# EAGLE board sim900min (EAGLE 6.2)
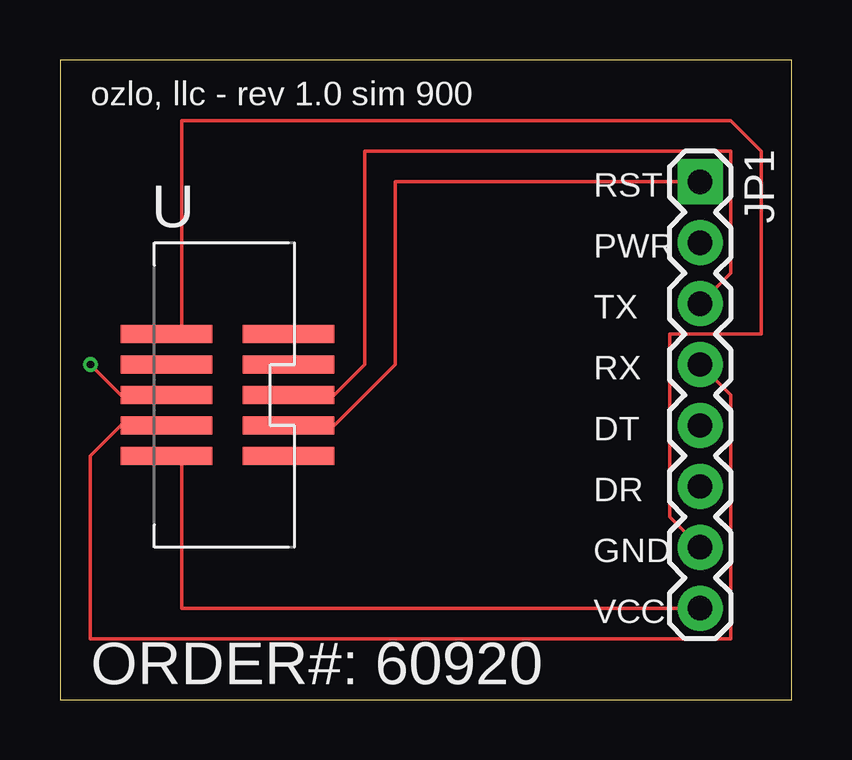
[diagram p0: board, top side]
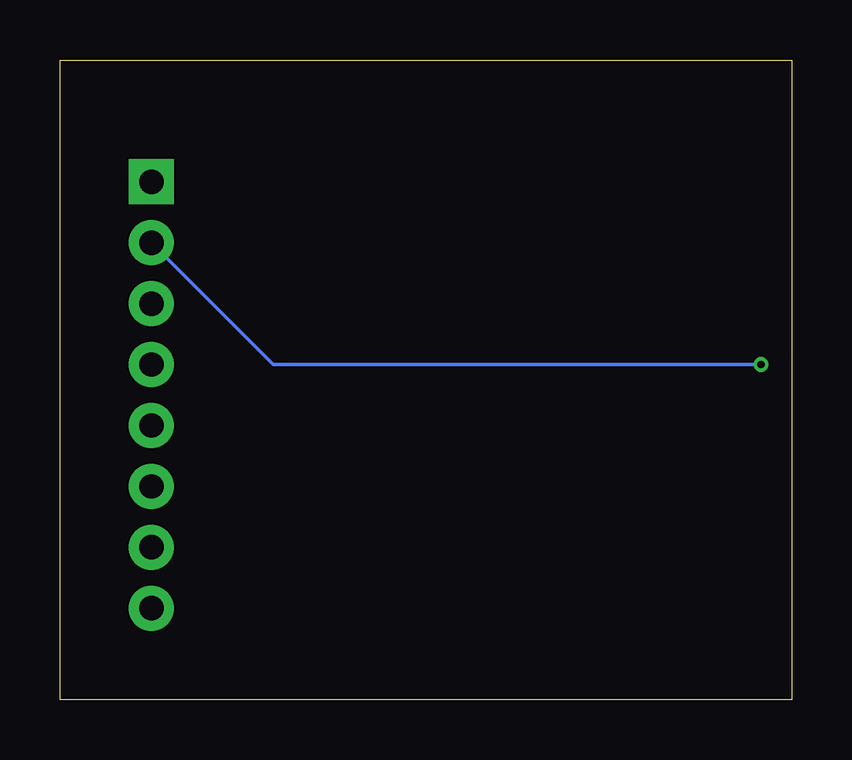
[diagram p1: board, bottom side, seen from below]

Size 30.48 x 26.67 mm. Coordinates in mm from the lower left corner, seen from the top.
Outline: 0,0 30.48,0 30.48,26.67 0,26.67 0,0
Copper layers (1*16): Top 0.035mm / dielectric 1.5mm / Bottom 0.035mm
Design rules: minimum track width 6mil, minimum drill 12mil, track to track 6mil, track to pad 6mil, pad to pad 6mil, via to via 6mil, smd to smd 0mil, copper to edge 10mil, drill to drill 10mil, minimum pad ring 10mil, minimum via ring 6mil, stop-mask expansion 2mil, vias tented up to drill 100mil, thermal gap 10mil

## Footprints (pad centres in the part's own frame; a part is rotated, then mirrored left to right if it is on the bottom)
1X08 = drill 1.016 pad 1.88 square: 1 0,0 | drill 1.016 pad 1.88: 2 2.54,0; 3 5.08,0; 4 7.62,0; 5 10.16,0; 6 12.7,0; 7 15.24,0; 8 17.78,0
SHF105DSM = smd 3.81 x 0.737: 1 -2.54,2.54; 2 2.54,2.54; 3 -2.54,1.27; 4 2.54,1.27; 5 -2.54,0; 6 2.54,0; 7 -2.54,-1.27; 8 2.54,-1.27; 9 -2.54,-2.54; 10 2.54,-2.54

## Placement (x,y rotation side)
JP1  [1X08]  26.67,21.59 270 top
U$1  SHF105SM  [SHF105DSM]  6.99,12.7 180 top

## Library data of the parts
JP1 = SparkFun-Connectors
U$1 = ozlollc

## Nets
+3V3: U$1.1
+5V: JP1.8 U$1.2
GND: JP1.7 U$1.10
N$2: JP1.4 U$1.4
N$3: JP1.3 U$1.5
N$4: JP1.2 U$1.6
N$5: JP1.1 U$1.3

## Tracks (layer width: path | path; a pad name or v marks a point on that pad's centre or on a via)
+5V
  Top 0.152: JP1.8 5.08,3.81 5.08,10.16 U$1.2
GND
  Top 0.152: JP1.7 25.4,7.62 25.4,15.24 29.21,15.24 29.21,22.86 27.94,24.13 5.08,24.13 5.08,15.24 U$1.10
N$2
  Top 0.152: JP1.4 27.94,12.7 27.94,2.54 1.27,2.54 1.27,10.16 2.54,11.43 3.81,11.43 U$1.4
N$3
  Top 0.152: JP1.3 27.94,17.78 27.94,22.86 12.7,22.86 12.7,13.97 11.43,12.7 10.16,12.7 U$1.5
N$4  (via drill 0.3)
  Top 0.152: v1.27,13.97 2.54,12.7 3.81,12.7 U$1.6
  Bottom 0.152: JP1.2 21.59,13.97 v1.27,13.97
N$5
  Top 0.152: JP1.1 13.97,21.59 13.97,13.97 11.43,11.43 10.16,11.43 U$1.3

## Text on the board
tNames: ozlo, llc - rev 1.0 sim 900 | RST | U | PWR | TX | RX | DT | DR | GND | VCC | ORDER#: 60920